# Altium PCB GymkhanaStoper v1.6 Main.PcbDoc
Units mm, origin at the board's own origin, x right, y up, seen from the top; angles counter-clockwise.
Board outline 60 x 104 mm, 2 copper layers (Top Layer, Bottom Layer); 22 components, 28 nets, 110 pads, 4 vias.
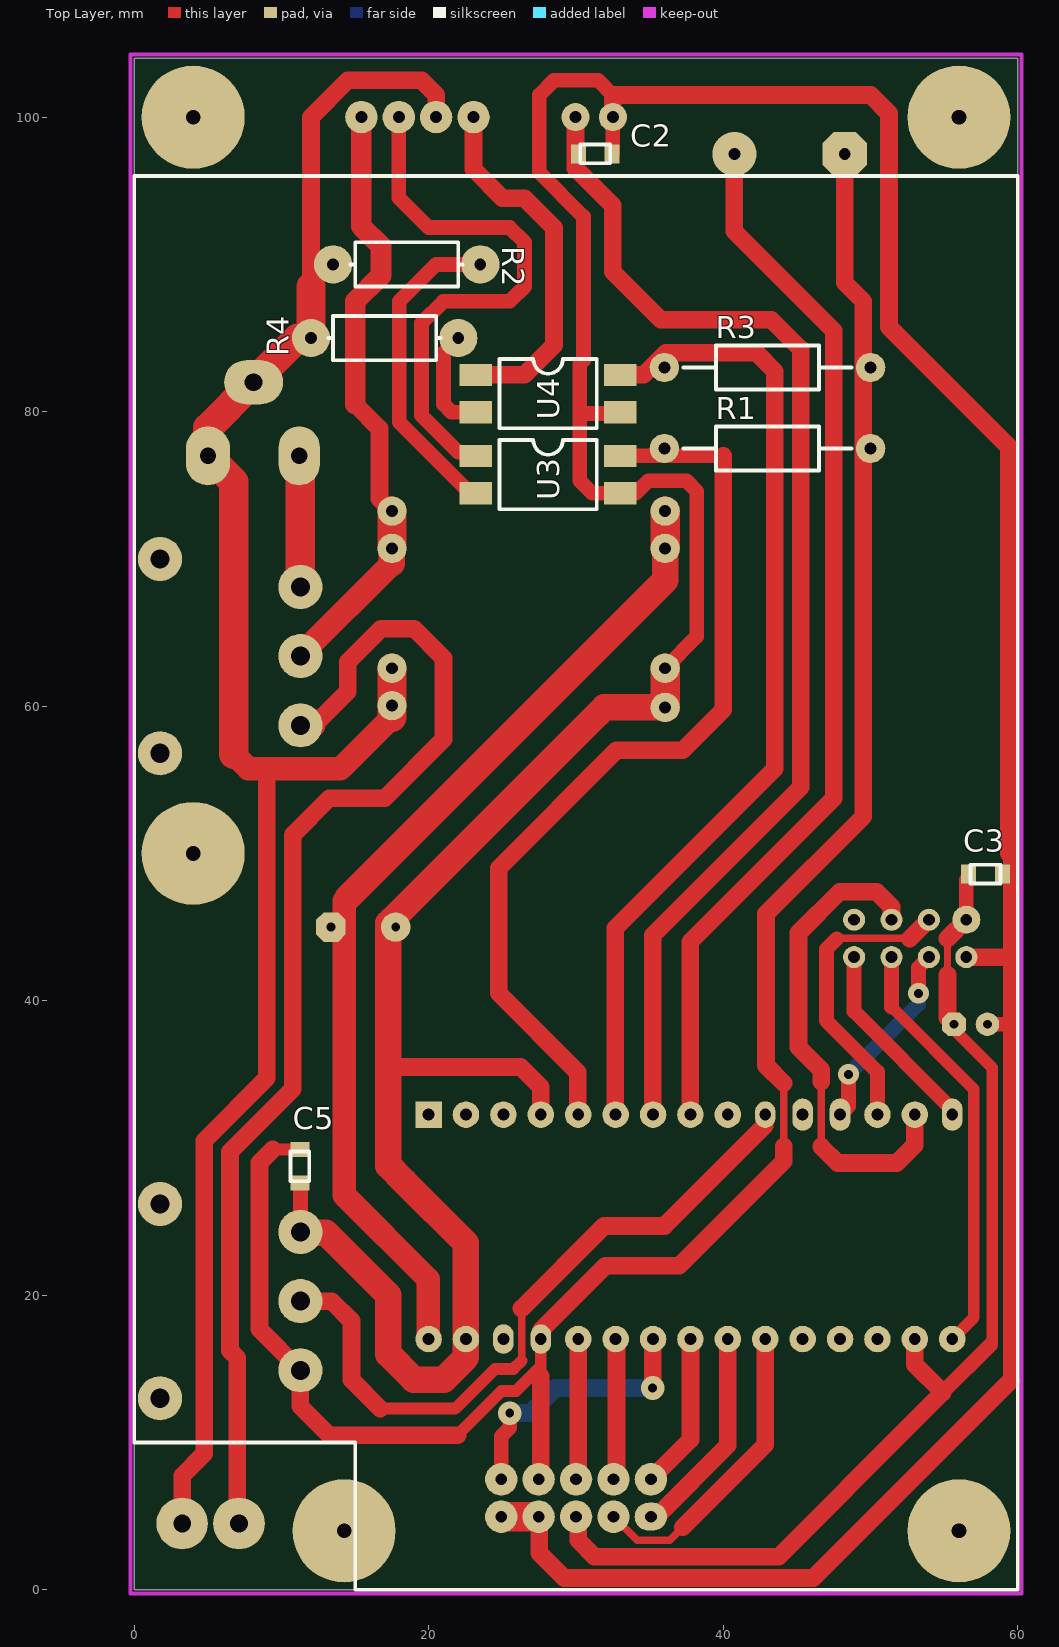
[diagram p0: Top Layer view]
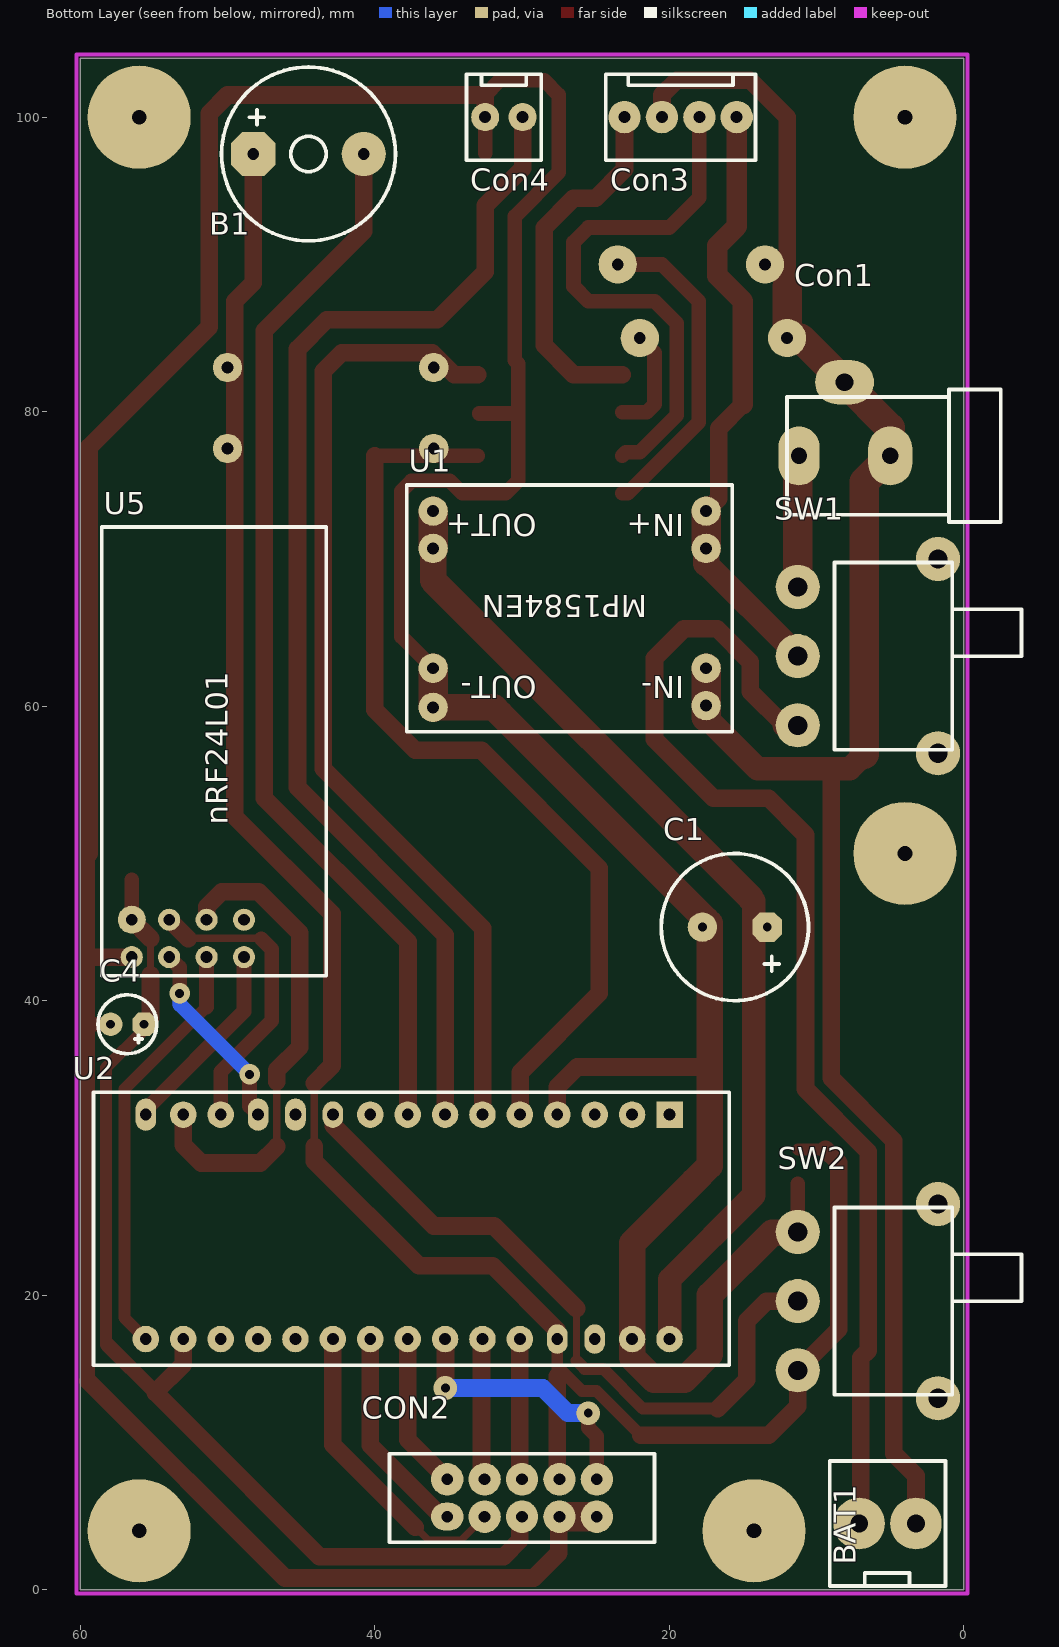
[diagram p1: Bottom Layer view, seen from below]
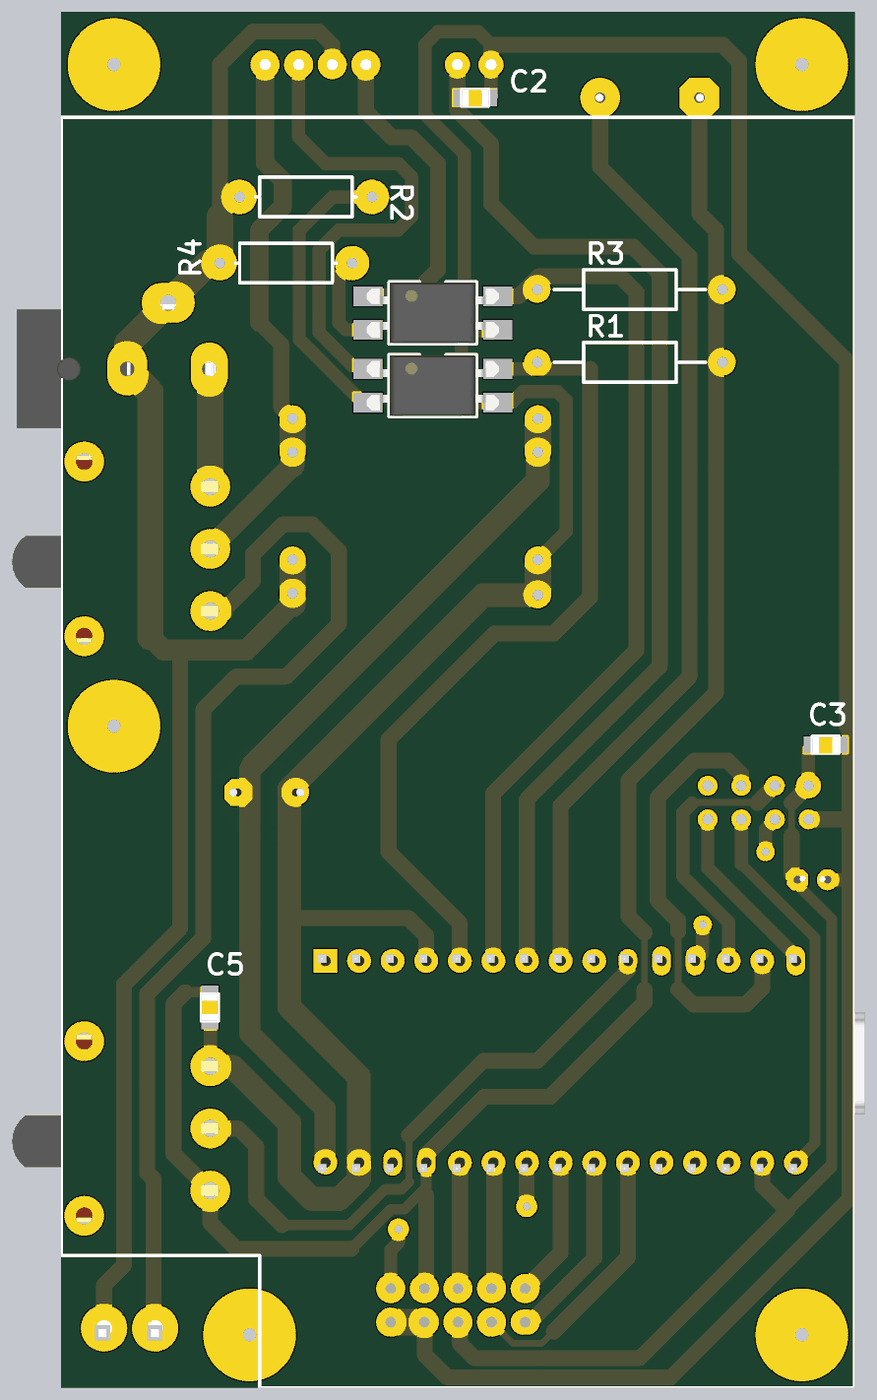
[diagram p2: 3D render of the assembled board from above, using the file's embedded part models]
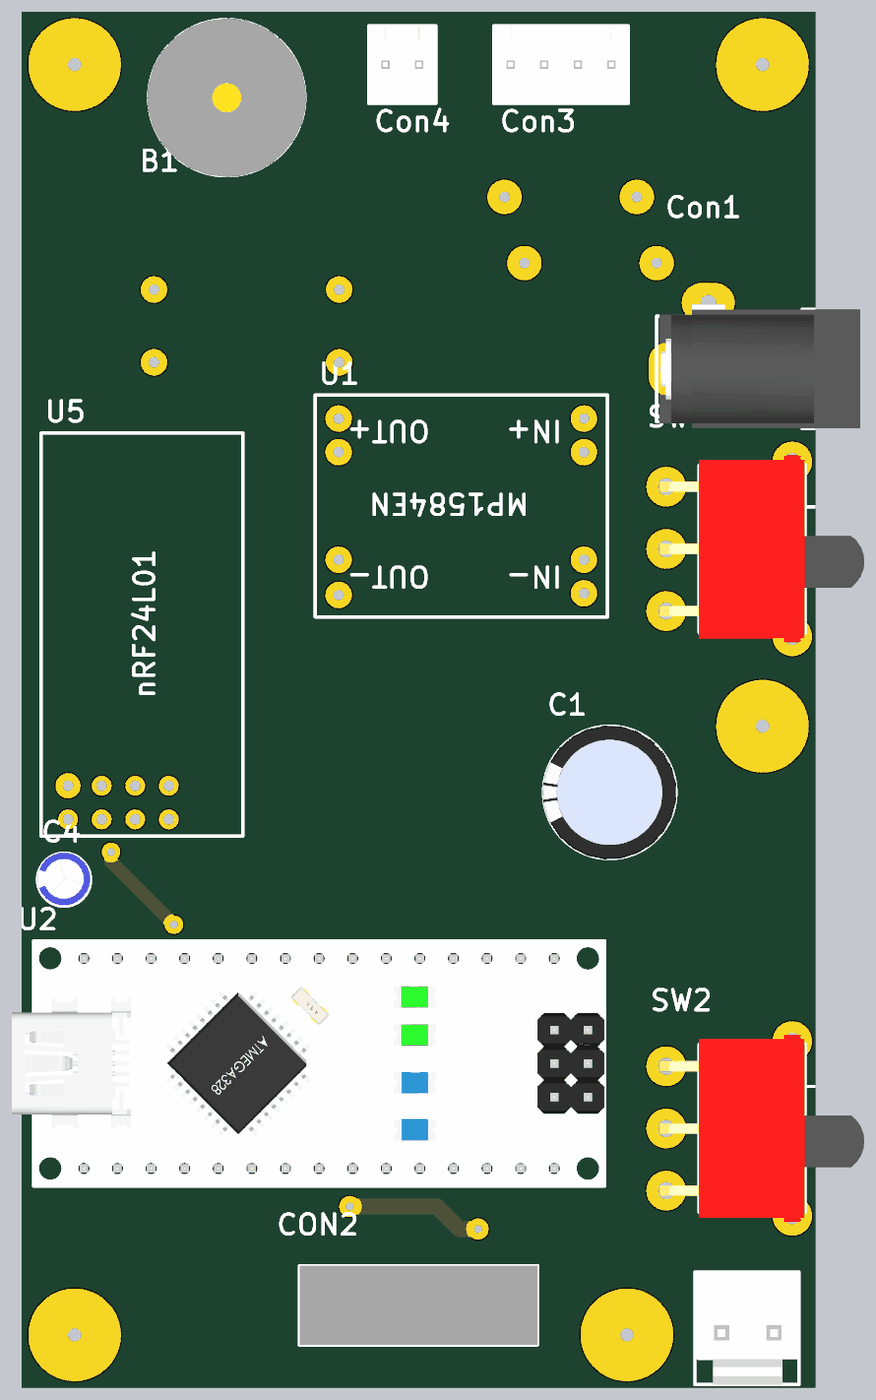
[diagram p3: 3D render of the assembled board from below, using the file's embedded part models]

## Layer stack, top to bottom
Top Solder: solder mask 0.0102, Solder Resist, Dk 3.5
Top Layer: signal copper 0.0356
Dielectric 1: dielectric 0.32, FR-4, Dk 4.8
Bottom Layer: signal copper 0.0356
Bottom Solder: solder mask 0.0102, Solder Resist, Dk 3.5

## Board outline
0,0 60,0 60,104 0,104

## Design rules (kind name [scope] priority, off if disabled: settings)
Clearance [All] p1: gap=0.254 ignorepadtopadclearanceinfootprint=FALSE except(0: Arc-Hole Track-Hole SMDPad-Hole THPad-Hole Via-Hole Fill-Hole Poly-Hole Region-Hole Text-Hole)
PolygonConnect [All] p1: connectstyle=Relief reliefconductorwidth=0.254 reliefentries=4 polygonreliefangle="90 Angle" airgapwidth=0.254
RoutingVias [All] p1: holewidth=0.711 width=1.27 viastyle="Through Hole" minholewidth=0.711 minwidth=1.27 maxholewidth=0.711 maxwidth=1.27
SolderMaskExpansion [All] p1: expansion=0.102
Width [All] p1: maxlimit=4 minlimit=0.5 preferedwidth=1.2
30 further rules are at their usual default settings.

## Classes and differential pairs
component class "GymkhanaStoper v1.6 Main": B1 BAT1 C1 C2 C3 C4 C5 Con4 Con? SW1 U1 U2

## Components (designator, comment, footprint, x,y, rotation, side; value= is the part's Value field where it differs from the comment)
B1 "*" "Buzzer F/CM12P" 44.5,97.5 r180 bottom
BAT1 "YUASA-ACCU-HP0.8-12/Y" KK2_4mm_JST 5.18,4.5 r180 bottom
C1 "*" 10x12.5x4.4 15.55,45 r0 bottom
C2 "kondensator" 0805-C 31.3,97.5 r180 top
C3 "kondensator" 0805-C 57.8,48.6 r180 top
C4 "*" 4x7x1.27 56.8,38.4 r0 bottom
C5 "kondensator" 0805-C 11.25,28.75 r90 top
Con1 "*" PowerJack2.5_THT 8.1,77 r0 bottom
CON2 "IDC10_2.54mm" IDC10_2.54mm_Tasma 30,6.23 r0 bottom
Con3 "*" KK4_2.54mm 15.42,100 r0 bottom
Con4 "*" KK2_2.54mm 29.96,100 r0 bottom
R1 "rezystor" 6.5x2.5x14 43,77.5 r0 top
R2 "rezystor" 6.5x2.5x10 18.5,90 r0 top
R3 "rezystor" 6.5x2.5x14 43,83 r0 top
R4 "rezystor" 6.5x2.5x10 17,85 r0 top
SW1 "*" "DPDT - SL13212c" 11.28,63.4 r90 bottom
SW2 "*" "DPDT - SL13212c" 11.28,19.6 r90 bottom
U1 "MP1584EN" MP1584EN 17.5,60.042 r0 bottom
U2 "NANO" "Arduino nano" 15.921,33.789 r0 bottom
U3 "*" 4SMD 28.1,75.73 r0 top
U4 "*" 4SMD 28.1,81.23 r0 top
U5 "NRF24L01" NRF24L01 56.5,42.96 r90 bottom

## Footprints (in the part's own frame and the unit in brackets; to place one, negate y for a bottom-side part, rotate by r counter-clockwise, add the part's x,y. Pads: shape width x height; smd on the part's side, far side on the other; paste and mask are expansions set on the pad)
4SMD [mm]
  rect 2.2x1.5 smd: 1(-4.9,1.27) 2(-4.9,-1.27) 3(4.9,-1.27) 4(4.9,1.27)
  silkscreen extent -3.3,-2.35 3.3,2.35, body extent -5,-2.29 5,2.29, height 3.86
4x7x1.27 [mm]
  oct 1.6x1.6 hole 0.6: 1(-1.135,0)
  round 1.6 hole 0.6: 2(1.135,0)
  silkscreen extent -2,-2 2,2, body extent -2.04,-2.11 2.06,1.99, height 7.01
6.5x2.5x10 [mm]
  round 2.6 hole 0.8: 1(-5,0) 2(5,0)
  silkscreen extent -3.81,-1.5 3.81,1.5
6.5x2.5x14 [mm]
  round 2 hole 0.8: 1(-7,0) 2(7,0)
  silkscreen extent -5.71,-1.5 5.71,1.5
10x12.5x4.4 [mm]
  oct 2x2 hole 0.6: 1(-2.2,0)
  round 2 hole 0.6: 2(2.2,0)
  silkscreen extent -5,-5 5,5, body extent -5.08,-5.08 5.08,5.08, height 12.71
0805-C [mil] "kondensator"
  rect 40x50 smd: 1(-45,0) 2(45,0)
  silkscreen extent -40,-25 40,25, body extent -40,-25 40,27, height 26
"Arduino nano" [mm] "arduino nano"
  rect 1.8x1.8 hole 0.8: 0(4.064,1.524)
  round 1.8 hole 0.8: 1(6.604,1.524) 2(9.144,1.524) 3(11.684,1.524) 4(14.224,1.524) 5(16.764,1.524) 6(19.304,1.524) 7(21.844,1.524) 8(24.384,1.524) 12(34.544,1.524) 13(37.084,1.524) 15(39.624,16.764) 16(37.084,16.764) 17(34.544,16.764) 18(32.004,16.764) 19(29.464,16.764) 20(26.924,16.764) 21(24.384,16.764) 22(21.844,16.764) 23(19.304,16.764) 24(16.764,16.764) 25(14.224,16.764) 28(6.604,16.764) 29(4.064,16.764)
  oval 1.4x1.8 hole 0.8: 9(26.924,1.524)
  oval 1.4x2.2 hole 0.8: 10(29.464,1.524) 11(32.004,1.524) 14(39.624,1.524)
  oval 1.4x2 hole 0.8: 26(11.684,16.764) 27(9.144,16.764)
  silkscreen extent 0,0 43.18,18.54, body extent 0,0 44.83,18.54, height 12.43
"Buzzer F/CM12P" [mm] "F/CM12P"
  oct 3x3 hole 0.8: 1(-3.75,0)
  round 3 hole 0.8: 2(3.75,0)
  silkscreen extent -5.9,-5.9 5.9,5.9, body extent -6,-6 6,6, height 9.5
"DPDT - SL13212c" [mm] "sl13212c"
  round 3 hole 1.3: 0(-6.6,-9.53) 0(6.6,-9.53) 1(0,0) 2(-4.7,0) 3(4.7,0)
  silkscreen extent -6.35,-15.2 6.35,-2.5, body extent -7.07,-14.97 7.07,0.64, height 6.71
IDC10_2.54mm_Tasma [mm] "AWLP10"
  round 2.2 hole 0.8: 1(-5.08,-1.27) 2(-5.08,1.27) 3(-2.54,-1.27) 4(-2.54,1.27) 5(0,-1.27) 6(0,1.27) 7(2.54,-1.27) 8(2.54,1.27) 9(5.08,-1.27)
  oval 2.2x1.9 hole 0.8: 10(5.08,1.27)
  silkscreen extent -9,-3 9,3, body extent -9,-3 9,3, height 8.01
KK2_2.54mm [mil] "NS25-W2P-2.54mm"
  round 75 hole 32: 1(0,0) 2(100,0)
  silkscreen extent -50,-115 150,115, body extent -50,-115 150,115, height 480
KK2_4mm_JST [mm] "B2P-VH"
  round 3.5 hole 1.2: 1(-1.93,0) 2(1.93,0)
  silkscreen extent -3.93,-4.25 3.93,4.25, body extent -3.86,-4.25 4,4.25, height 10.9
KK4_2.54mm [mm] "NS25-W4P-2.54mm"
  round 2.2 hole 0.813: 1(0,0) 2(2.54,0) 3(5.08,0) 4(7.62,0)
  silkscreen extent -1.27,-2.92 8.89,2.92, body extent -1.27,-2.92 8.89,2.92, height 12.19
MP1584EN [mm]
  round 2 hole 0.8: 1(0,0) 2(0,-2.54) 3(0,-10.668) 4(0,-13.208) 5(18.542,-13.208) 6(18.542,-10.668) 7(18.542,-2.54) 8(18.542,0.127)
  silkscreen extent -1.78,-14.99 20.32,1.78
NRF24L01 [mm]
  round 1.5 hole 0.8: 1(0,0) 3(0,-2.54) 4(2.54,-2.54) 5(0,-5.08) 6(2.54,-5.08) 7(0,-7.62) 8(2.54,-7.62)
  round 1.9 hole 0.8: 2(2.54,0)
  silkscreen extent -1.27,-13.21 29.21,2.03
PowerJack2.5_THT [mm] "FCR681465P"
  oval 2.8x4 hole 1.1: 1(3.1,0)
  oval 4x3 hole 1.2: 2(0,-5)
  oval 3x4 hole 1.1: 3(-3.1,0)
  silkscreen extent -10.6,-4.5 3.9,4.5, body extent -11.5,-4.9 3.7,4.5, height 11

## Part data
B1: library part Buzzer
C1 C4: library part C+, Napi阠ie=100V
  C1: Pojemno滄=220uF
  C4: Pojemno滄=1uF
C2 C3 C5: library part C, Napi阠ie=100V, Pojemno滄=100nF
Con1: library part FCR681465P, "FCR681465P"
Con3: library part NS25-W4P-2.54mm
Con4: library part Con2
R1 R2 R3 R4: library part R, Moc="1/2 W"
  R1 R3: Rezystancja=10k
  R2 R4: Rezystancja=1k
SW1: library part "SP3T ON-OFF-ON", "5MS3S102AM6QE"
SW2: library part "SPDT ON-ON", "5MS1S102AM6QE"
U3 U4: library part PC817

## Free pads (board coordinates)
  round 7 hole 1: 0(4,50) 0(4,100) 0(14.25,4) 0(56,4) 0(56,100)

## Via types
v1: diameter 1.6, hole 0.6, Top Layer to Bottom Layer, 2 vias
v2: diameter 1.4, hole 0.6, Top Layer to Bottom Layer, 2 vias

## Nets (pads, with @x,y where several pads share a name; then routed paths per layer and width w, separated by ;. In a path a pad name is that pad's centre, name@x,y a point inside that pad or via, vN(x,y) a via of type N, cw(c..) or ccw(c..) an arc to the next point about the centre after c; other vN are vias at no path point)
3.3V: C3.2 C4.1 CON2.6 U2.16 U5.2 | length 73.8
  Top Layer w0.5: 55.225,41.75 55.225,44.225
  Top Layer w0.8: C4.1@55.7,38.365 55.7,38 58.254,35.446 58.254,16.654
  Top Layer w1: 54.9,13.4 58.154,16.654 ; U5.2 C3.2@56.5,48.214
  Top Layer w1.2: CON2.6 30.146,4.814 30.146,3.354 31.248,2.252 43.752,2.252 53.005,11.505 54.9,13.4 53.005,15.295 U2.16 ; 55.225,41.75 55.225,38.84 C4.1@55.7,38.365 ; 55.225,44.225 U5.2
5V: B1.1 C5.2 CON2.3 R1.2 R3.2 SW2.2 U2.26 | length 143.4
  Top Layer w0.5: 44.1,30.1 44.1,34.4
  Top Layer w0.8: 9.393,29.893 C5.2 ; 21.944,10.5 24.944,13.5 25.936,13.5 27.605,15.169 ; 27.605,14.5 27.605,15.169 ; U2.26 27.605,15.169
  Top Layer w1.2: 9.393,29.893 8.5,29 8.5,17.68 SW2.2 11.28,12.47 13.25,10.5 21.944,10.5 ; CON2.3 27.605,7.645 27.605,14.5 ; U2.26 27.605,17.605 32,22 37,22 44.1,29.1 44.1,30.1 ; 44.1,34.4 42.9,35.6 42.9,45.9 49.5,52.5 49.5,87.5 48.25,88.75 B1.1
7V: C1.1 U1.5 U1.6 U2.29 | length 67.6
  Top Layer w1.6: 14.5,47 14.272,46.772 14.272,26.777 19.965,21.085 U2.29@19.965,17.025
  Top Layer w1.8: 14.5,47 36.042,68.542 U1.6
  Top Layer w2: U1.6 U1.5
12V: Con3.1 SW1.1 U1.3 U1.4 | length 41.4
  Top Layer w1.2: 15,80.5 16.646,78.854 16.646,74.104 U1.4
  Top Layer w1.4: 15,80.5 15,87.5 16.75,89.25 16.75,91.25 15.42,92.58 Con3.1
  Top Layer w1.6: SW1.1@11.53,63.4 11.53,63.73 17.5,69.7
  Top Layer w1.8: 17.5,69.7 U1.3
  Top Layer w2: U1.3 U1.4
GND: BAT1.2 Con1.2 Con1.3 Con3.3 R2.1 R4.1 U1.1 U1.2 | length 128.5
  Top Layer w1.2: BAT1.2 3.25,7.75 4.75,9.25 4.75,30.5 9,34.75 9,55.5 8.75,55.75 ; 12,88.5 12,100 14.5,102.5 19.5,102.5 20.5,101.5 Con3.3
  Top Layer w1.6: 6.75,56.75 7.75,55.75 8.75,55.75 14,55.75 U1.1@17.5,59.25
  Top Layer w2: 6.75,56.75 6.75,75.25 Con1.3 5,78.9 Con1.2 11.1,85 R4.1 12,88.5 ; U1.1@17.5,59.25 U1.1 U1.2
NetB1_2: B1.2 U2.7 | length 72.1
  Top Layer w1.2: U2.7@37.745,32.265 37.745,43.995 47.5,53.75 47.5,85.5 40.75,92.25 B1.2
NetBAT1_1: BAT1.1 SW1.2 | length 81.6
  Top Layer w1.2: BAT1.1@7,4.5 7,15.75 6.5,16.25 6.5,29.75 10.75,34 10.75,51.25 13.25,53.75 17,53.75 21,57.75 21,63.25 19,65.25 16.75,65.25 14.5,63 14.5,61 SW1.2@12.2,58.7
  Top Layer w1.6: SW1.2 SW1.2@12.2,58.7
NetC2_2: C2.2 Con4.1 U2.6 | length 82.6
  Top Layer w1.2: Con4.1 29.96,96.54 32.5,94 32.5,89.5 35.75,86.25 43.25,86.25 45.25,84.25 45.25,54.5 35.205,44.455 U2.6@35.205,32.265
NetCon1_1: Con1.1 SW1.3 | length 8.9
  Top Layer w1.2: Con1.1 Con1.1@11.28,76.92
  Top Layer w2: SW1.3 Con1.1@11.28,76.92
NetCON2_1: CON2.1 U2.23 | length 18.5
  Top Layer w1: CON2.1 24.92,10.42 25.5,11 v1(25.5,12)
  Top Layer w1.2: v1(35.2,13.7) 35.2,17 U2.23
  Bottom Layer w1.2: v1(25.5,12) 26.9,12 28.6,13.7 v1(35.2,13.7)
NetCON2_5: CON2.5 U2.25 | length 9.6
  Top Layer w1.2: CON2.5 30.145,7.645 U2.25
NetCON2_7: CON2.7 U2.24 | length 9.6
  Top Layer w1.2: CON2.7 32.75,7.71 32.75,16.96 U2.24
NetCON2_8: CON2.8 U2.20 | length 20.8
  Top Layer w0.5: CON2.8 34.144,3.356 36.356,3.356 37.25,4.25
  Top Layer w1.2: 37.25,4.25 42.845,9.845 U2.20
NetCON2_9: CON2.9 U2.22 | length 10.6
  Top Layer w1.2: CON2.9 37.765,10.185 U2.22
NetCON2_10: CON2.10 U2.21 | length 14.5
  Top Layer w1.2: CON2.10 35.46,4.96 40.305,9.805 U2.21
NetCon3_2: Con3.2 U3.1 | length 37.4
  Top Layer w1: Con3.2 17.96,94.54 20,92.5 25.5,92.5 26.5,91.5 26.5,88.5 25.5,87.5 21,87.5 19.5,86 19.5,79.75 22,77.25 22.95,77.25 U3.1
NetCon3_4: Con3.4 U4.1 | length 24.8
  Top Layer w1.2: Con3.4 23.04,96.46 25,94.5 26.5,94.5 28.5,92.5 28.5,84.5 26.5,82.5 U4.1
NetR1_1: R1.1 U2.4 U3.4 | length 62.9
  Top Layer w1: U3.4 40,77
  Top Layer w1.2: U2.4@30.125,32.265 30.125,35.125 24.75,40.5 24.75,49 32.75,57 37.25,57 40,59.75 40,77
NetR2_2: R2.2 U3.2 | length 21.9
  Top Layer w1: U3.2 22.824,74.46 18,79.284 18,87.5 20.5,90 R2.2
NetR3_1: R3.1 U2.5 U4.4 | length 66.5
  Top Layer w1.2: U2.5@32.665,32.265 32.665,44.915 43.5,55.75 43.5,82.75 42.25,84 36.1,84 34.6,82.5 ; U4.4 34.5,82.5
NetR4_2: R4.2 U4.2 | length 7.3
  Top Layer w1: R4.2 21,84 21,80.5 21.54,79.96 U4.2
NetSW2_1: SW2.1 U2.9 | length 47.7
  Top Layer w0.5: 26.3,15.55 26.3,19.1
  Top Layer w0.8: 16.7,12.3 21.8,12.3 24.5,15 25.75,15 26.3,15.55
  Top Layer w1.2: SW2.1 13.4,19.6 14.75,18.25 14.75,14.25 16.7,12.3 ; 26.3,19.1 31.9,24.7 36,24.7 42.8,31.5 42.8,32.22 U2.9
NetU2_11: U2.11 U5.3 | length 13.2
  Top Layer w1: U2.11 48.5,32.84 v2(48.5,35) ; v2(53.25,40.5) 53.25,42.25 U5.3
  Bottom Layer w1: v2(48.5,35) 53.25,39.75 v2(53.25,40.5)
NetU2_12: U2.12 U5.4 | length 20.5
  Top Layer w0.5: 47.7,44.24 52.66,44.24
  Top Layer w1: 47.7,44.2 47,43.5 47,40.1 47,38.65 50.465,35.185 U2.12
  Top Layer w1.2: 52.66,44.2 U5.4
NetU2_13: U2.13 U5.6 | length 33.3
  Top Layer w0.5: 46.655,30.095 46.655,34.5
  Top Layer w1.2: 46.655,30.095 47.775,28.975 51.775,28.975 53.005,30.205 U2.13 ; 46.655,34.5 46.655,35.295 45.1,36.85 45.1,44.6 47.9,47.4 50.4,47.4 51.42,46.38 U5.6
NetU2_14: U2.14 U5.7 | length 13.5
  Top Layer w1: U5.7 48.88,40.72 48.88,39.27 55.545,32.605 U2.14
NetU2_15: U2.15 U5.5 | length 28.8
  Top Layer w0.8: 51.42,39.58 57,34 57,18.48 U2.15
  Top Layer w1: 51.42,39.58 U5.5
sGND: C1.2 C2.1 C3.1 C4.2 C5.1 CON2.2 CON2.4 Con4.2 SW2.3 U1.7 U1.8 U2.3 U2.28 U3.3 U4.3 U5.1 | length 312.5
  Top Layer w1: SW2.3@10.6,23.9 SW2.3@10.95,24.25 ; SW2.3 C5.1@11.28,27.577 ; C2.1@32.5,97.557 Con4.2 ; 32.5,101.5 31.5,102.5 28.5,102.5 27.5,101.5 27.5,96.25 30.5,93.25 30.5,83.5 30.25,83.25 30.25,79.875 ; U4.3@32.9,79.875 30.25,79.875 ; U1.7 38.2,64.74 38.2,74.6 37.5,75.3 34.9,75.3 34.06,74.46 U3.3 31.1,74.46 30.25,75.31 30.25,79.875 ; C4.2 59.508,38.4 ; 59.5,14.2 59.508,14.208 59.508,38.4 ; 59.508,49.992 59.508,38.4
  Top Layer w1.2: 17.25,35.5 26.25,35.5 27.605,34.145 U2.3 ; CON2.4@27.5,4.96 27.5,2.5 29.202,0.798 46.098,0.798 59.5,14.2 ; Con4.2 32.5,101.5 50,101.5 51.25,100.25 51.25,85.75 59.4,77.6 59.4,49.992 ; U5.1 59.25,42.96
  Top Layer w1.8: SW2.3@10.95,24.25 13,24.25 17.25,20 17.25,16 18.975,14.275 21.025,14.275 22.525,15.775 U2.28 ; U2.28@22.505,17.025 22.505,23.545 18.322,27.727 17.25,28.8 17.25,35.5 17.25,45.25 17.5,45.5 31.49,59.49 31.915,59.915 U1.8
  Top Layer w2: CON2.2 CON2.4 ; U1.8 U1.7
pads on no net: SW1.0 SW2.0 U2.0 U2.1 U2.2 U2.8 U2.10 U2.17 U2.18 U2.19 U2.27 U5.8

## Keep-outs
Keep-Out Layer:
  lines w0.254: -0.25,-0.25 -0.25,104.25 60.25,104.25 60.25,-0.25 -0.25,-0.25

## Silkscreen, mask and mechanical layers (free items; w line width, h text height)
Top Overlay:
  lines w0.254: 15,0 60,0 60,96 0,96 0,10 15,10 15,0.1

## Text inside footprints (layer, text, board x,y; h text height)
U1: Bottom Overlay "IN-" at 19,62.042 h1.52 r180; Bottom Overlay "OUT-" at 29,62.042 h1.52 r180; Bottom Overlay "IN+" at 19,73.042 h1.52 r180; Bottom Overlay "OUT+" at 29,73.042 h1.52 r180
U5: Bottom Overlay "nRF24L01" at 50,51.96 h1.52 r270